# Altium PCB SafetyLightBoard.PcbDoc
Units mil, origin at the board's own origin, x right, y up, seen from the top; angles counter-clockwise.
Board outline 2250 x 2020 mil, 2 copper layers (Top Layer, Bottom Layer); 33 components, 27 nets, 122 pads, 20 vias.
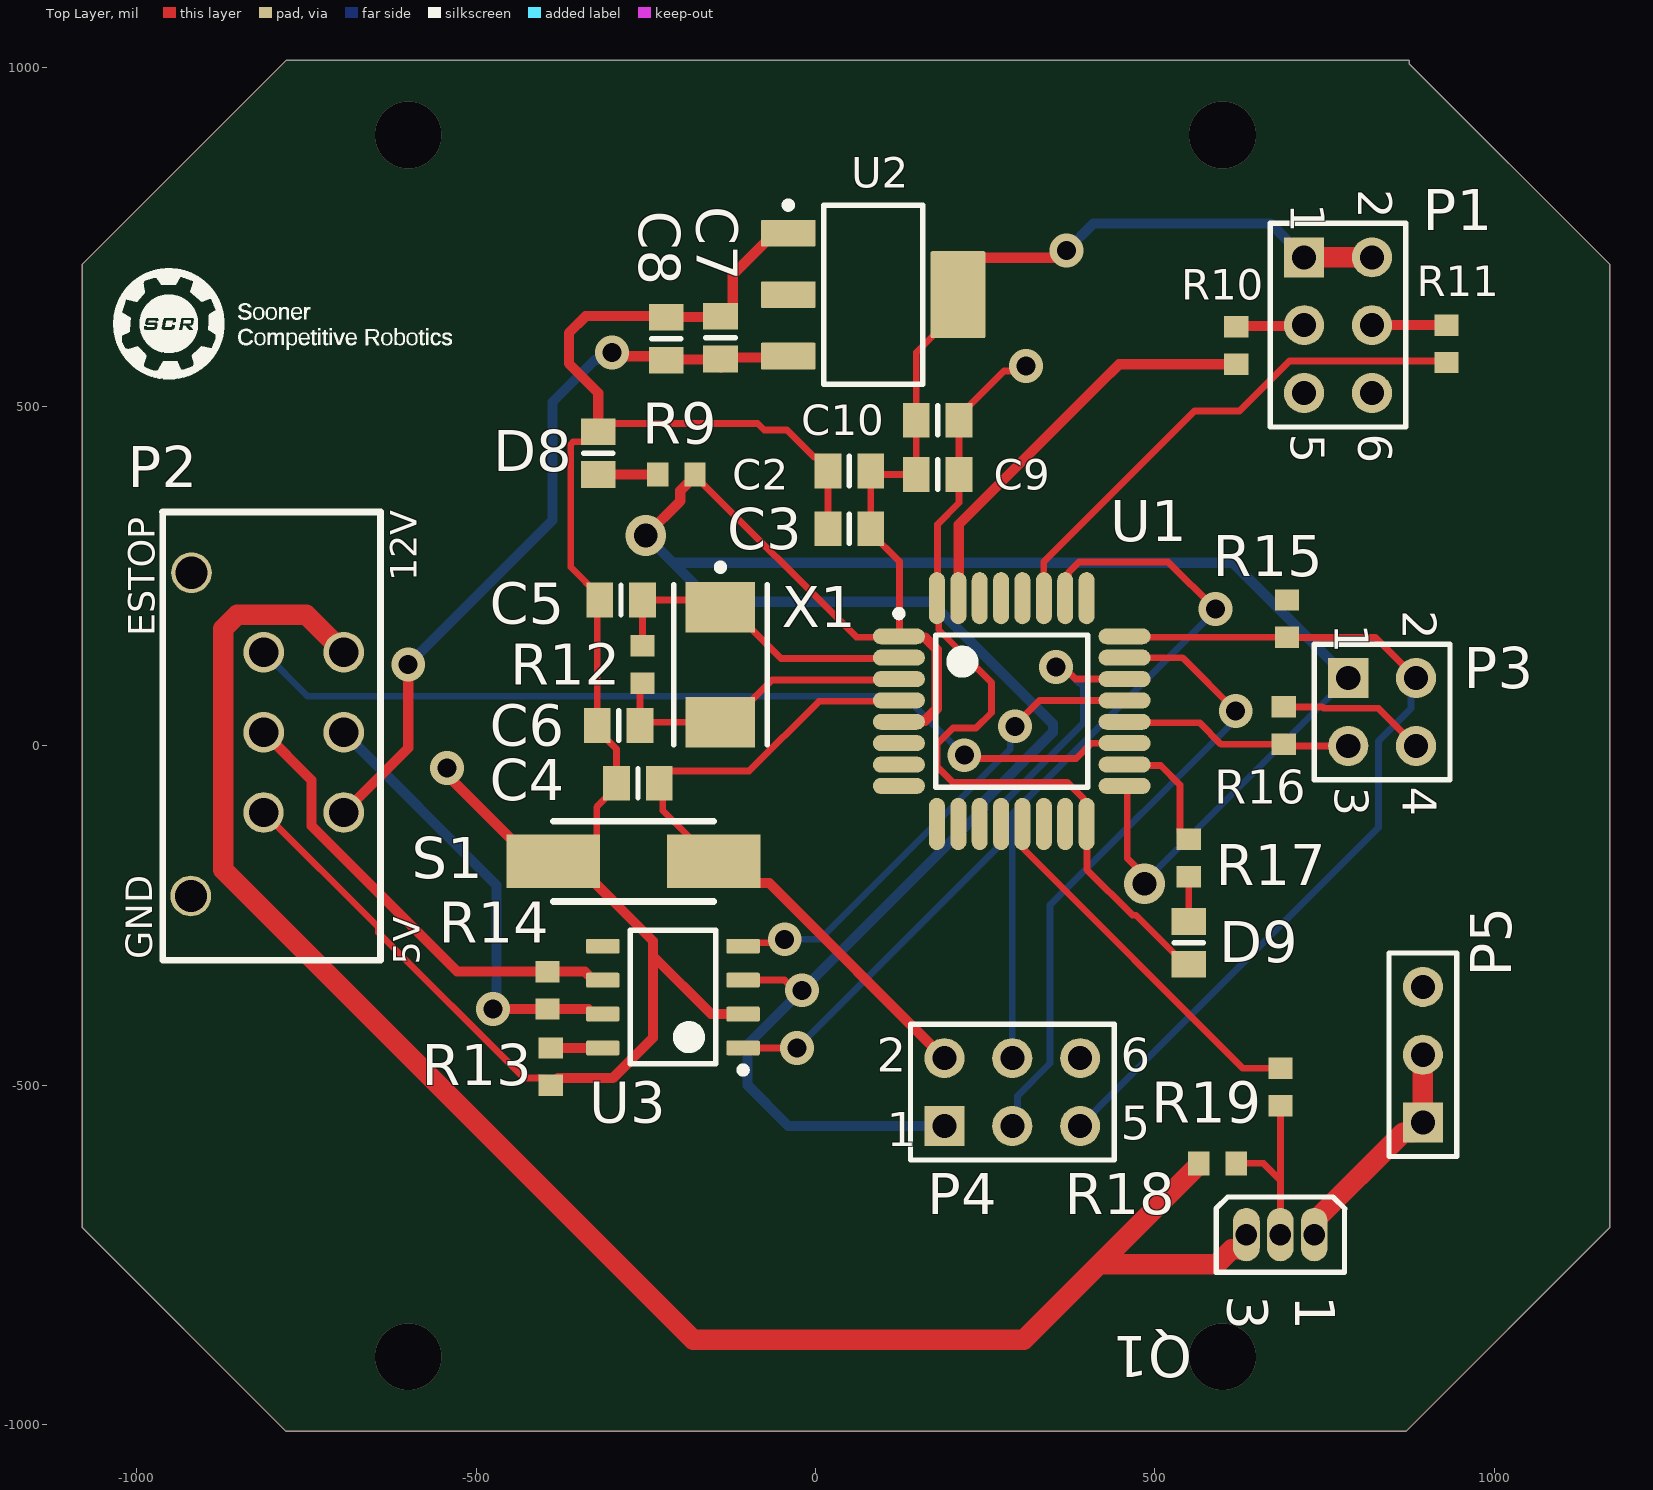
[diagram p0: Top Layer view]
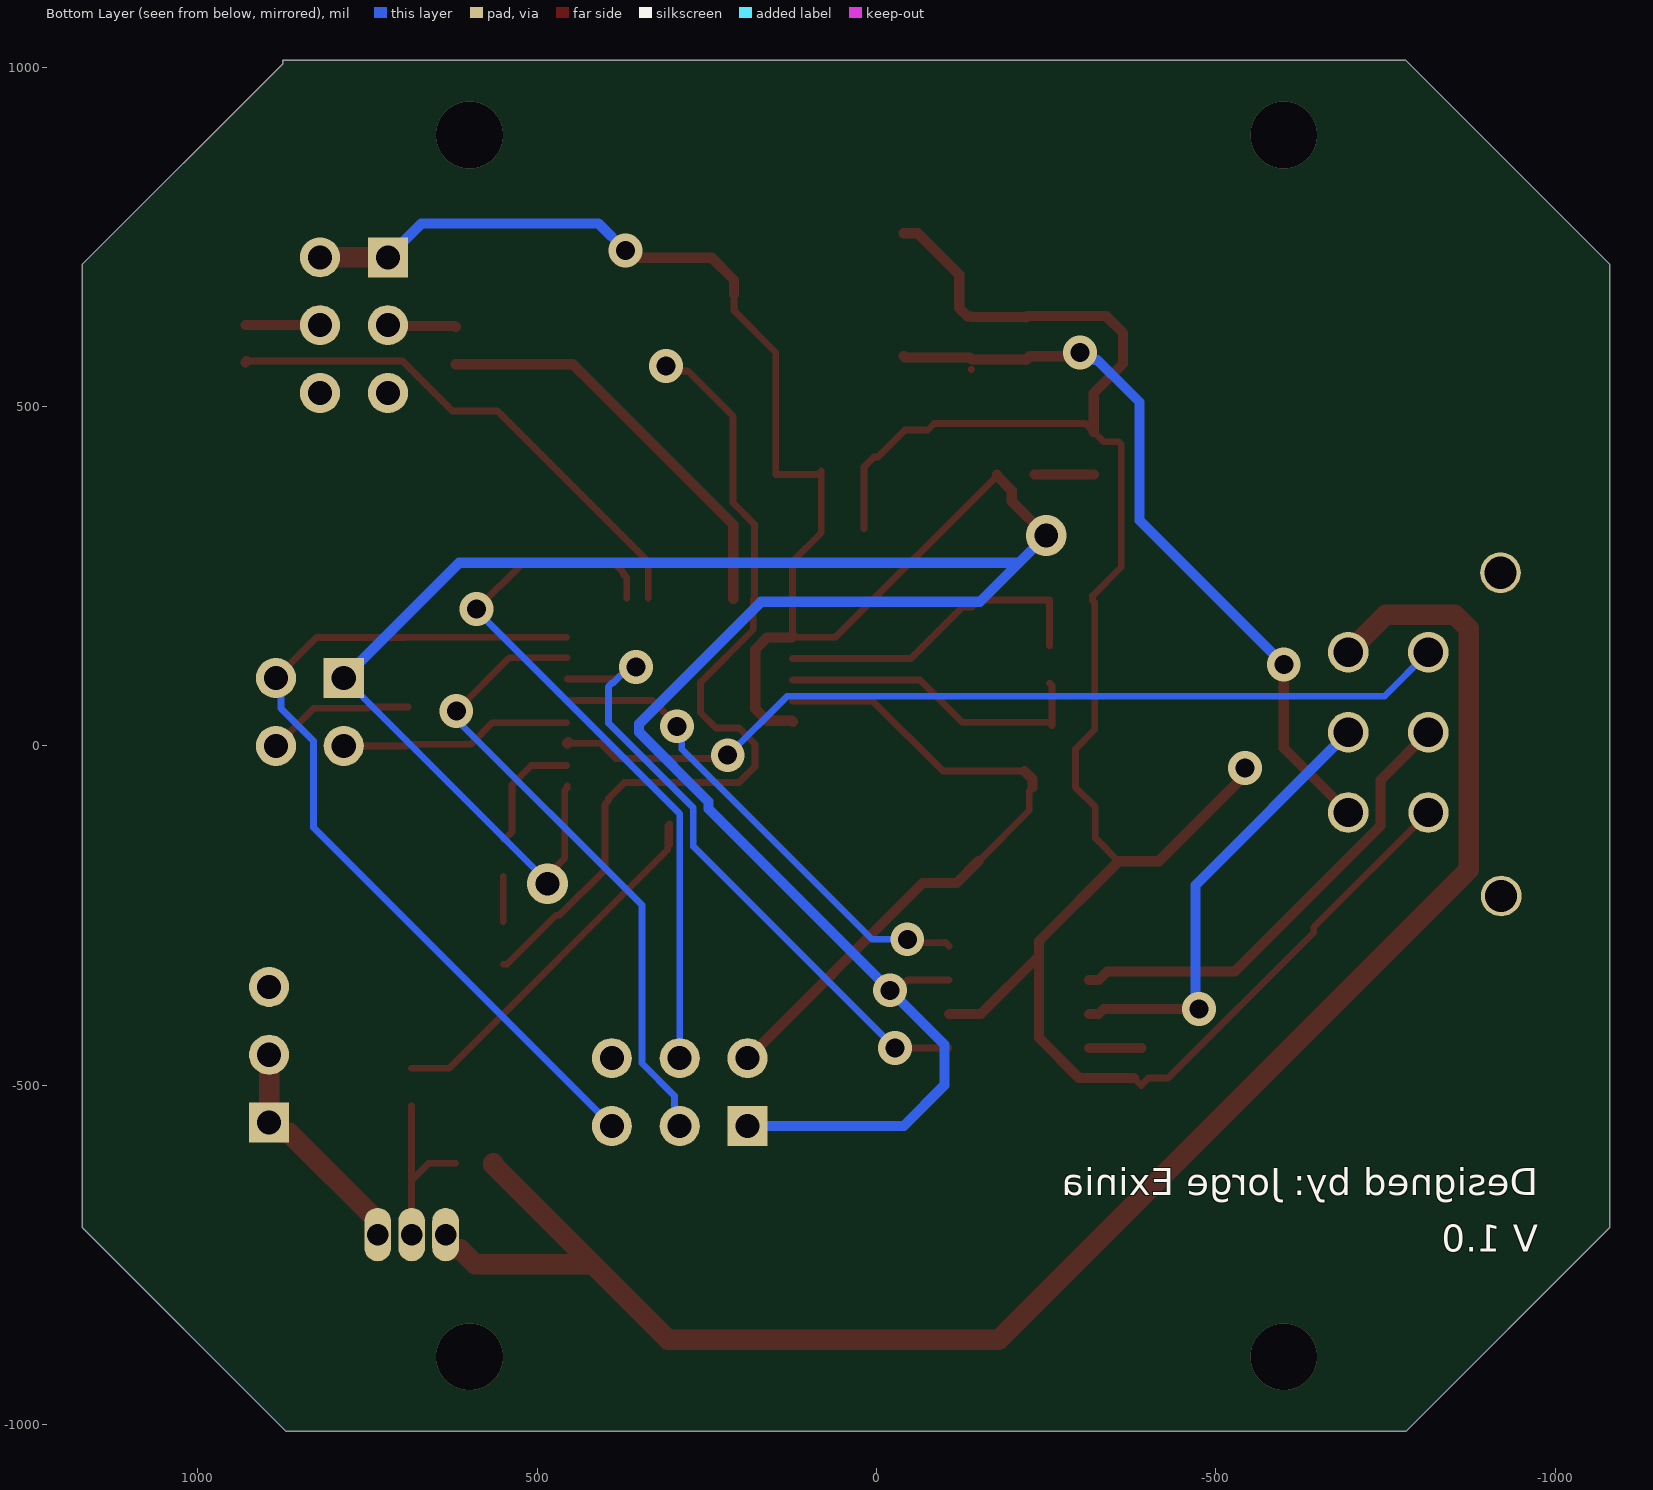
[diagram p1: Bottom Layer view, seen from below]

## Layer stack, top to bottom
Top Solder: solder mask 0.4, Solder Resist, Dk 3.5
Top Layer: signal copper 1.4
Dielectric 1: dielectric 12.6, FR-4, Dk 4.8
Bottom Layer: signal copper 1.4
Bottom Solder: solder mask 0.4, Solder Resist, Dk 3.5

## Board outline
1170,-710 870,-1010 -780,-1010 -1080,-710 -1080,710 -780,1010 875,1010 875,1005 1170,710

## Design rules (kind name [scope] priority, off if disabled: settings)
Clearance [All] p1: gap=10 ignorepadtopadclearanceinfootprint=FALSE except(0: Arc-Hole Track-Hole SMDPad-Hole THPad-Hole Via-Hole Fill-Hole Poly-Hole Region-Hole Text-Hole)
PolygonConnect [All] p1: connectstyle=Relief reliefconductorwidth=10 reliefentries=4 polygonreliefangle="90 Angle" airgapwidth=10
RoutingVias [All] p1: holewidth=28 width=50 viastyle="Through Hole" minholewidth=28 minwidth=50 maxholewidth=28 maxwidth=50
SolderMaskExpansion [All] p1: expansion=4 istentingtop=FALSE
Width [All] p1: maxlimit=50 minlimit=10 preferedwidth=10 minimp=50.000000 maximp=50.000000 favimp=50.000000
30 further rules are at their usual default settings.

## Components (designator, comment, footprint, x,y, rotation, side; value= is the part's Value field where it differs from the comment)
C2 "Cap" 6-0805_L 50,405 r0 top value=100nF
C3 "Cap" 6-0805_L 50,320 r0 top value=100nF
C4 "Cap" 6-0805_L -261.5,-55 r0 top value=0.1UF
C5 "Cap" 6-0805_L -286.5,215 r180 top value=20pF
C6 "Cap" 6-0805_L -290,30 r180 top value=20pF
C7 "Cap" 6-0805_L -140,601.5 r270 top value=100nF
C8 "Cap" 6-0805_L -220,600 r270 top value=100uF
C9 "Cap" 6-0805_L 180,400 r180 top value=330uF
C10 "Cap" 6-0805_L 180,480 r180 top value=100nF
D8 "LED1" 6-0805_L -320,431.5 r90 top
D9 "LED1" 6-0805_L 550,-290 r270 top
P1 "2x3 Header" HDR2X3 720,720 r270 top
P2 "2x3 Header" "Molex Connector" -813.11,-98.11 r90 top
P3 "Header 2X2" HDR2X2 785,100 r270 top
P4 "MHDR2X3" HDR2X3 190,-560 r0 top
P5 "Header 3H" HDR1X3 895,-555 r90 top
Q1 "MOSFET-P" E3 685,-720 r270 top
R9 "Res1" 1608[0603] -205,400 r180 top value=510
R10 "Res1" 1608[0603] 620,590 r270 top value=1K
R11 "Res1" 1608[0603] 930,592.56 r270 top value=1K
R12 "Res1" 1608[0603] -255,120 r270 top value=1M
R13 "Res1" 1608[0603] -390,-472.56 r90 top value=10K
R14 "Res1" 1608[0603] -395,-360 r270 top value=120
R15 "Res1" 1608[0603] 695,187.56 r90 top value=10k
R16 "Res1" 1608[0603] 690,30 r270 top value=10k
R17 "Res1" 1608[0603] 550,-165 r270 top value=510
R18 "Res1" 1608[0603] 592.44,-615 r180 top value=10k
R19 "Res1" 1608[0603] 685,-502.56 r90 top value=100
S1 "SW-PB" "Push Switch 3x6x2.5" -386.22,-170 r0 top
U1 "STM32F334K8T6" STM-LQFP32_M 289.25,51.34 r0 top
U2 "REG1117-3.3" DCY0004A_M 85,665 r0 top
U3 "SN65HVD230QDR" D0008A_L -210,-370 r180 top
X1 "ABM7-8.000MHZ-D2Y-T" ABRA-ABM7-2_V -140,119.65 r270 top

## Footprints (in the part's own frame and the unit in brackets; to place one, negate y for a bottom-side part, rotate by r counter-clockwise, add the part's x,y. Pads: shape width x height; smd on the part's side, far side on the other; paste and mask are expansions set on the pad)
6-0805_L [mm] "Chip Resistor, Body 2.0x1.2mm, IPC High Density"
  rect 1x1.3 smd: 1(-0.8,0) 2(0.8,0)
  silkscreen extent 0,-0.55 0,0.55, body extent -1.07,-0.7 1.07,0.7, height 0.7
1608[0603] [mm] "Chip Capacitor, Body 1.6x0.8mm, IPC High Density"
  rect 0.8x0.9 smd: 1(-0.7,0) 2(0.7,0)
  body extent -0.87,-0.48 0.87,0.48, height 1.3
ABRA-ABM7-2_V [mm] "SMD, 2-Leads, Body 6x3.5mm"
  rect 1.9x2.6 smd: 1(-2.15,0) 2(2.15,0)
  silkscreen extent -3.77,-1.75 3,1.75, body extent -3,-1.75 3,1.75, height 1.4
D0008A_L [mm] "SOIC, 8-Leads, Body 5x4mm, Pitch 1.27mm, IPC High Density"
  rrect18% 1.25x0.55 smd: 1(-2.625,1.905) 2(-2.625,0.635) 3(-2.625,-0.635) 4(-2.625,-1.905) 5(2.625,-1.905) 6(2.625,-0.635) 7(2.625,0.635) 8(2.625,1.905)
  silkscreen extent -2.75,-2.5 1.6,2.85, body extent -3,-2.45 3,2.45, height 1.63
DCY0004A_M [mm] "SOT223, 4-Leads, Body 6.7x3.7mm, Pitch 2.3mm, IPC Low Density"
  rrect10% 2.05x1 smd: 1(-3.175,2.3) 2(-3.175,0) 3(-3.175,-2.3)
  rrect5% 2.05x3.25 smd: 4(3.175,0)
  silkscreen extent -3.3,-3.35 1.85,3.47, body extent -3.5,-3.25 3.5,3.25, height 1.62
E3 [mm] "TO, Flat Index; 3 In-Line, Axial Leads; Body Dia. 4.6mm; Lead Dia. 0.5 mm (max)"
  oval 2x1 hole 0.8: 1(0,1.27) 2(0,0) 3(0,-1.27)
  silkscreen extent -1.41,-2.41 1.41,2.41
HDR1X3 [mm] "Connector; Header; 3 Position"
  rect 1.5x1.5 hole 0.9: 1(0,0)
  round 1.5 hole 0.9: 2(2.54,0) 3(5.08,0)
  silkscreen extent -1.27,-1.27 6.35,1.27
HDR2X2 [mm] "Connector; Header; 2x2 Position"
  rect 1.5x1.5 hole 0.9: 1(0,0)
  round 1.5 hole 0.9: 2(0,2.54) 3(2.54,0) 4(2.54,2.54)
  silkscreen extent -1.27,-1.27 3.81,3.81
HDR2X3 [mm] "Connector; Header; 3x2 Position"
  rect 1.5x1.5 hole 0.9: 1(0,0)
  round 1.5 hole 0.9: 2(0,2.54) 3(2.54,0) 4(2.54,2.54) 5(5.08,0) 6(5.08,2.54)
  silkscreen extent -1.27,-1.27 6.35,3.81
"Molex Connector" [mm]
  round 1.524 hole 1.1: 1(6,-3) 2(3,-3) 3(0,-3) 4(6,0) 5(3,0)
  oval 1.524x1.5 hole 1.1: 6(0,0)
  round 1.524 hole 1.2: ""(-3.125,2.725) ""(8.975,2.7)
  silkscreen extent -5.53,-4.39 11.25,3.78
"Push Switch 3x6x2.5" [mm]
  rect 3.5x2 smd: 1(0,0) 2(6,0)
  silkscreen extent 0,-1.5 6,1.5
STM-LQFP32_M [mm] "QFP, 32-Leads, Body 7x7mm, Pitch 0.8mm, IPC Low Density"
  oval 1.95x0.6 smd: 1(-4.225,2.8) 2(-4.225,2) 3(-4.225,1.2) 4(-4.225,0.4) 5(-4.225,-0.4) 6(-4.225,-1.2) 7(-4.225,-2) 8(-4.225,-2.8) 17(4.225,-2.8) 18(4.225,-2) 19(4.225,-1.2) 20(4.225,-0.4) 21(4.225,0.4) 22(4.225,1.2) 23(4.225,2) 24(4.225,2.8)
  oval 0.6x1.95 smd: 9(-2.8,-4.225) 10(-2,-4.225) 11(-1.2,-4.225) 12(-0.4,-4.225) 13(0.4,-4.225) 14(1.2,-4.225) 15(2,-4.225) 16(2.8,-4.225) 25(2.8,4.225) 26(2,4.225) 27(1.2,4.225) 28(0.4,4.225) 29(-0.4,4.225) 30(-1.2,4.225) 31(-2,4.225) 32(-2.8,4.225)
  silkscreen extent -4.35,-2.85 2.85,3.77, body extent -3.5,-3.5 3.5,3.5, height 1.6

## Part data
C2 C3 C4 C5 C6 C7 C8 C9 C10: "Capacitor", LatestRevisionDate=17-Jul-2002, LatestRevisionNote="Re-released for DXP Platform.", PackageDescription="Radial Cap, Thru-Hole; 2 Leads; 0.3 in Pin Spacing", PackageReference=RAD-0.3, Published=8-Jun-2000, Publisher="Altium Limited"
D8 D9: "Typical RED GaAs LED", LatestRevisionDate=08-Jul-2005, LatestRevisionNote="Mech Layer 1 removed.", PackageDescription="LED; 2 Leads", PackageReference=LED-1, Published=8-Jun-2000, Publisher="Altium Limited"
P3: "Header, 2-Pin, Dual row", LatestRevisionDate=17-Jul-2002, LatestRevisionNote="Re-released for DXP Platform.", Publisher="Altium Limited"
P4: "Header, 3-Pin, Dual row", LatestRevisionDate=17-Jul-2002, LatestRevisionNote="Re-released for DXP Platform.", Publisher="Altium Limited"
P5: "Header, 3-Pin, Right Angle", LatestRevisionDate=17-Jul-2002, LatestRevisionNote="Re-released for DXP Platform.", Publisher="Altium Limited"
Q1: "P-Channel MOSFET", LatestRevisionDate=17-Jul-2002, LatestRevisionNote="Re-released for DXP Platform.", PackageDescription="TO, Flat Index; 3 In-Line, Axial Leads; Body Dia. 4.6mm; Lead Dia. 0.5 mm (max)", PackageReference=E3, PackageVersion=1995/1996, Published=8-Jun-2000, Publisher="Altium Limited"
R9 R10 R11 R12 R13 R14 R15 R16 R17 R18 R19: "Resistor", LatestRevisionDate=17-Jul-2002, LatestRevisionNote="Re-released for DXP Platform.", PackageDescription="Axial Device, Thru-Hole; 2 Leads; 0.3 in Pin Spacing", PackageReference=AXIAL-0.3, Published=8-Jun-2000, Publisher="Altium Limited"
S1: "Switch", LatestRevisionDate=17-Jul-2002, LatestRevisionNote="Re-released for DXP Platform.", PackageDescription="Switch; 2 Leads", PackageReference=SPST-2, Published=24-Mar-1999, Publisher="Altium Limited"
U1: library part CMP-0537-00074-1, "ARM Cortex-M4 32-bit MCU, 64 KB Flash, 16 KB Internal RAM, 25 I/Os, 32-Pin LQFP, -40 to 85 degC, Tray", I/Os (High Current)=25, Operating Frequency(F) (Processor speed) (MHz)=72, Package Description="32-Pin Low Profile Quad Flat Package, 7 x 7 mm Body, 0.8 mm Pitch", Package Reference=LQFP32, Supply Voltage(Vcc) min (V)=2, ComponentLink1Description="Manufacturer URL", ComponentLink1URL=http://www.st.com/, ComponentLink2Description=Datasheet, ComponentLink2URL=http://www.st.com/st-web-ui/static/active/en/resource/technical/document/datasheet/DM00097745.pdf, Core="ARM Cortex-M4", D/A Converter=3, DatasheetVersion="Rev. 4", FLASH Size (Prog) (kB)=64, Internal RAM Size (kB)=16, Mounting Technology="Surface Mount", Packing=Tray
U2: library part CMP-0395-00549-2, "Single Output LDO, 800 mA, Fixed 3.3 V Output, 3.8 to 15 V Input, with Internal Current Limiting, 4-pin SOT-223 (DCY), -40 to 125 degC, Green (RoHS & no Sb/Br)", Manufacturer="Texas Instruments", Rating=Catalog, Code_JEDEC=TO-261, ComponentLink1Description="Manufacturer URL", ComponentLink1URL=http://www.ti.com/, ComponentLink2Description=Datasheet, ComponentLink2URL=http://www.ti.com/general/docs/lit/getliterature.tsp?genericPartNumber=REG1117-33&fileType=pdf, ComponentLink3Description="Package Specification", ComponentLink3URL=http://www.ti.com/litv/pdf/mpds094a, DatasheetVersion=SBVS001D, Eco-Plan="Green (RoHS & no Sb/Br)", Fixed Output Options(V)=5, Iout(Max)(A)=0.8, Iq(Typ)(mA)=4, Mounting Technology="Surface Mount", PackageDescription="4-Pin Plastic Small Outline, Body 3.5 x 6.5 mm, Pitch 2.3 mm", PackageReference=DCY0004A, PackageVersion=4202506/B, PartNumber=REG1117-3.3, SubFamily="Single Channel LDO", Vdo(Typ)(mV)=1100, Vin(Max)(V)=15, Vin(Min)(V)=3.8, Vout Adj(Max)(V)=3.3, Vout Adj(Min)(V)=3.3
U3: library part CMP-0315-00033-2, "Automotive Catalog 3.3 V CAN Transceiver, 17 mA, 3.3 V, -40 to 125 degC, 8-pin SOIC (D), Green (RoHS & no Sb/Br)", Drivers Per Package=1, Manufacturer="Texas Instruments", Rating=Catalog, Supply Voltage(s)(V)=3.3, Code_JEDEC=MS-012AA, ComponentLink1Description=Datasheet, ComponentLink1URL=http://www.ti.com/lit/ds/symlink/sn65hvd230.pdf, DatasheetVersion=SLOS346K, Eco-Plan="Green (RoHS & no Sb/Br)", ICC(Max)(mA)=17, Isolated=No, Mounting Technology="Surface Mount", PackageDescription="8-Pin Plastic Small Outline Integrated Circuit, 4.9 x 3.9 mm, Pitch 1.27 mm Pitch", PackageReference=D0008A, PackageVersion="revM, Jun-2011", PartNumber=SN65HVD230QDR, Receivers Per Package=1, SubFamily=CAN, Transient Pulse Protection(V)="-25 to 25"
X1: library part CMP-2000-05034-1, "Microprocessor Crystal, 8 MHz, 18 PF, -40 to 85 degC, 2-Pin SMD, RoHS, Tape and Reel", ESR (Equivalent Series Resistance)=100Ohm, Frequency=8MHz, Frequency Stability=±30ppm, Frequency Tolerance=±20ppm, Load Capacitance=18pF, Manufacturer=Abracon, Operating Mode=Fundamental, Operating Temperature=-40degC~85degC, Package / Case=2-SMD, Package Description="2-Pin Surface Mount Device, Body 6 x 3.5 mm", Package Reference=ABM7, Standard Package=1,000, 3D Model="ABM7.pdf /  / ABM7.stp", Catalog Drawings="ABM7SeriesTop /  / ABM7SeriesSide /  / ABM7SeriesBottom", Category=CrystalsandOscillators, Datasheet URL=https://datasheet.ciiva.com/1357/1718755-1357277.pdf, Datasheet Version=Dec-17, Family=Crystals, Featured Product=ABM7andABM11Crystals, Height="0.055\"(1.40mm)", Manufacturer URL=http://www.abracon.com/, Mounting Type=SurfaceMount, Online Catalog=ABM7Series, Other Names="535-9831-2 / ABM7-8.000MHZ-D-2-Y-T / ABM78000MHZD2YT", Packaging=Tape&Reel(TR), RoHS Information=RoHS2/REACHCompliance, Series=ABM7, Size / Dimension="0.236\"Lx0.138\"W(6.00mmx3.50mm)", Type=MHzCrystal

## Via types
v1: diameter 50, hole 28, Top Layer to Bottom Layer, 14 vias
v2: diameter 98.5, hole 98.5, Top Layer to Bottom Layer, 4 vias
v3: diameter 60, hole 35, Top Layer to Bottom Layer, 2 vias

## Nets (pads, with @x,y where several pads share a name; then routed paths per layer and width w, separated by ;. In a path a pad name is that pad's centre, name@x,y a point inside that pad or via, vN(x,y) a via of type N, cw(c..) or ccw(c..) an arc to the next point about the centre after c; other vN are vias at no path point)
+5: C7.2 C8.2 P2.3 U2.3 | length 1118
  Top Layer w10: C7.2@-140,555 C7.2@-139.45,554.45
  Top Layer w15: P2.3 -600,-3.11 v1(-600,120) ; v1(-300,580) -294.25,574.25 -225.75,574.25 C8.2 -219.25,569.25 -140.75,569.25 C7.2 -137.78,572.22 -42.22,572.22 U2.3
  Bottom Layer w15: v1(-600,120) -387.5,332.5 -387.5,506.69 -370.44,523.75 -325.68,568.51 -320.96,568.51 -309.47,580 v1(-300,580)
+12: P2.1 Q1.3 R18.2 | length 2641.8
  Top Layer w30: P2.1 -750,193.11 -851.89,193.11 -872.57,172.43 -872.57,-182.43 -180,-875 306.85,-875 418.43,-763.43 ; R18.2 564.88,-616.97 418.43,-763.43 ; Q1.3 635,-737.15 630.67,-741.48 613.52,-741.48 591.28,-763.72 418.72,-763.72 418.43,-763.43
BOOT0: R10.2 U1.31 | length 616.5
  Top Layer w15: U1.31@211.26,216.34 211.26,326.26 417.81,532.82 447.44,562.44 R10.2
BOOT1: R11.2 U1.27 | length 770.6
  Top Layer w10: U1.27 336.5,271.5 558.43,493.43 625,493.43 698.6,567.03 R11.2@927.97,567.03
  Top Layer w15: R11.2@927.97,567.03 R11.2
CAN_RX: U1.21 U3.4 | length 728.5
  Top Layer w10: U3.4 -100.83,-289.17 -100.09,-289.91 -50.38,-289.91 v1(-45.29,-284.82) ; v1(293.95,29.01) 293.95,30.97 330.07,67.09 U1.21
  Bottom Layer w10: v1(-45.29,-284.82) 6.75,-284.82 287.05,-4.52 287.05,20.02 v1@294.7,27.68
CAN_TX: U1.22 U3.1 | length 971.1
  Top Layer w10: U3.1 v1(-27.05,-445) ; v1(354.25,116.34) 365.08,116.34 382.83,98.58 U1.22
  Bottom Layer w10: v1@-45,-445 -37.5,-437.5 -34.55,-437.5 v1(-27.05,-445) 270,-147.95 270,-91.48 395,33.52 395,87.35 389.14,93.2 387.62,93.2 365.82,115 v1@355,115
CANH: P2.2 R14.2 U3.7 | length 665.5
  Top Layer w15: v1(-475,-387.44) -474.94,-387.5 -395.06,-387.5 R14.2 -334.57,-387.56 -327.13,-395 U3.7
  Bottom Layer w15: P2.2 -470,-205 v1@-470,-387.5
CANL: P2.5 R14.1 U3.6 | length 690.3
  Top Layer w15: P2.5 -742.5,-50.61 -742.5,-117.79 -595.29,-265 -527.84,-332.44 R14.1 -339.68,-332.44 -327.13,-345 U3.6
ESTOP_SIG: P2.4 U1.19 | length 1346.7
  Top Layer w10: v1(219.25,-13.66) 224.25,-18.66 384.25,-18.66 407.01,4.09 U1.19
  Top Layer w15: U1.19@453.94,5.74 U1.19
  Bottom Layer w10: P2.4 -748.1,73.1 -463.1,73.1 131.9,73.1 v1@220,-15
GND: C2.1 C3.1 C4.1 C5.2 C6.2 C7.1 C8.1 C9.1 C10.1 D8.2 D9.2 P1.5 P1.6 P2.6 P3.4 P4.6 P5.3 R13.1 R16.1 S1.1 U1.16 U1.32 U2.1 U3.2 | length 4771.8
  Top Layer w10: P2.6 -644.21,-267.01 -644.21,-274.8 -429.64,-489.37 -400.75,-489.37 R13.1 R13.1@-379.25,-489.37 ; S1.1@-356.69,-170 -322.32,-135.63 -322.32,-90.24 -292.99,-60.91 C4.1 -292.99,-4.41 -321.5,24.09 C6.2 -321.5,211.5 C5.2 -317.99,220.91 -360.59,263.5 -360.59,444.14 -356.43,448.31 -334.69,448.31 D8.2 -307.99,475 -85,475 -75.43,465.43 -41.93,465.43 -2.09,425.59 3.82,425.59 18.5,410.91 C2.1 C3.1 ; U1.32 181.62,215.07 181.62,171.22 259.25,93.59 259.25,48.91 236.68,26.34 202.68,26.34 179.25,2.91 179.25,-30.23 202.8,-53.77 371.26,-53.77 394.8,-77.32 394.8,-80.05 U1.16@399.49,-84.74 ; U1.32@179.76,216.34 179.76,326.58 211.5,358.32 C9.1 C10.1 211.5,485.91 277.94,552.35 302.35,552.35 v1(310,560) ; U1.16@400.24,-86.08 400.24,-182.54 467.03,-249.33 471.93,-249.33 544.09,-321.5 D9.2 ; R16.1 747.17,57.56 749.26,55.47 829.53,55.47 P3.4
  Top Layer w15: v1(-542.73,-32.27) -536.04,-38.96 -536.04,-49.71 -415.75,-170 S1.1 -356.69,-170 -239.29,-287.4 -239.29,-309.47 ; R13.1@-379.25,-489.37 -298.68,-489.37 -239.29,-429.99 -239.29,-309.47 ; D8.2 -320,520.14 -363.3,563.44 -363.3,608.4 -338.4,633.3 -221.8,633.3 C8.1 -219.25,632.24 -140.75,632.24 C7.1 -134.09,632.99 -121.91,645.18 -121.91,694.31 -60.67,755.55 U2.1 ; U3.2 -153.76,-395 -239.29,-309.47
NetC5_1: C5.1 R12.1 U1.2 X1.1 | length 481.8
  Top Layer w10: R12.1 C5.1 -150.71,215 X1.1 -126.22,204.29 -50.67,128.74 U1.2@123.66,128.74
NetC6_1: C6.1 R12.2 U1.3 X1.2 | length 473.9
  Top Layer w10: R12.2 -258.5,88.94 -258.5,35 C6.1 -253.5,35 X1.2 -126.22,35 -63.98,97.24 U1.3@123.66,97.24
NetD8_1: D8.1 R9.2 | length 87.4
  Top Layer w15: D8.1 R9.2
NetD9_1: D9.1 R17.2 | length 65.9
  Top Layer w10: D9.1 R17.2
NetP1_3: P1.3 R10.1 | length 101
  Top Layer w15: R10.1 621.22,618.78 718.78,618.78 P1.3
NetP1_4: P1.4 R11.1 | length 110
  Top Layer w15: P1.4 820.06,620.06 929.94,620.06 R11.1
NetP5_1: P5.1 P5.2 Q1.1 | length 339.9
  Top Layer w30: Q1.1 735,-700.32 865.79,-569.53 880.47,-569.53 P5.1 P5.2
NetQ1_2: Q1.2 R18.1 R19.1 | length 265.2
  Top Layer w10: R18.1 660,-615 685,-640 ; Q1.2 685,-640 ; R19.1 685,-640
NetR13_2: R13.2 U3.8 | length 76.7
  Top Layer w15: R13.2 U3.8
NRST: C4.2 P4.2 S1.2 U1.4 | length 1015.4
  Top Layer w10: C4.2@-230,-60.91 -225,-65.91 -225,-95 S1.2 ; C4.2@-217.81,-36.91 -97.66,-36.91 5,65.75 U1.4@123.66,65.75
  Top Layer w15: C4.2@-230,-60.91 C4.2 -230,-49.09 C4.2@-217.81,-36.91 ; S1.2 -118.13,-201.87 -68.13,-201.87 P4.2
PA7: R19.2 U1.13 | length 579.8
  Top Layer w10: U1.13@305,-145.26 U1.13 307.61,-117.61 307.61,-152.49 630.12,-475 R19.2
PA8: R17.1 U1.18 | length 179.3
  Top Layer w10: U1.18@456.34,-28.74 508.74,-28.74 537.28,-57.28 537.28,-126.69 548.03,-137.44 R17.1
PA10: P3.3 R16.2 U1.20 | length 342.8
  Top Layer w10: U1.20@456.34,34.25 566.04,34.25 597.85,2.44 R16.2 692.44,0 P3.3
PA13: P4.3 U1.23 | length 943
  Top Layer w10: U1.23 540.51,130.08 v1(619.25,51.34)
  Bottom Layer w10: P4.3 297.5,-552.5 297.5,-515.47 345.47,-467.5 345.47,-234.53 620,40 v1@620,50
PA14: P3.2 P4.5 R15.1 U1.24 | length 1318.6
  Top Layer w10: U1.24@456.34,160.24 694.76,160.24 R15.1 825,160 P3.2
  Bottom Layer w10: P4.5 829.53,-120.47 829.53,7.5 877.5,55.47 877.5,92.5 P3.2
PB3: P4.4 U1.26 | length 1076
  Top Layer w10: U1.26 367.99,247.94 372.68,252.62 372.68,255.36 388.38,271.06 519.76,271.06 v1(589.25,201.57)
  Bottom Layer w10: P4.4 290,-99.76 v1@590,200.24
VCC: C2.2 C3.2 C9.2 C10.2 P1.1 P1.2 P3.1 P4.1 R9.1 R15.2 U1.1 U1.5 U1.17 U2.2 U2.4 U3.3 | length 5561.3
  Top Layer w10: R9.1@-177.44,398.03 60.35,160.24 123.66,160.24 123.66,271.93 81.5,314.09 C3.2 81.5,400 C2.2 86.5,400 C9.2 C10.2 148.5,579.88 210,641.38 U2.4@210,660.35 ; U3.3 -45.82,-345 -30.82,-360 v1(-20,-360) ; U1.17 455.59,-61.53 459.25,-65.19 459.25,-165.02 484.92,-190.69 v3(484.92,-202.99)
  Top Layer w15: v3(-250,310) -199.31,360.69 -199.31,376.16 -177.44,398.03 R9.1 ; U1.5 124.56,37.24 161.09,37.24 178.8,54.95 178.8,142.22 161.09,159.93 124.56,159.93 U1.1 ; U2.4 210,686.6 242.85,719.46 349.99,719.46 360.53,730 v1(370,730) ; P1.1@697.97,742.03 P1.1
  Top Layer w30: P1.1 P1.2
  Bottom Layer w10: v3@485.67,-204.33 485.67,-199.33 P3.1
  Bottom Layer w15: v3(-250,310) -210,270 ; P4.1 -40,-560 -100,-500 -100,-440 247.5,-92.5 247.5,-82.16 349.86,20.2 349.86,32.62 170,212.48 -152.48,212.48 -210,270 ; v1(370,730) 410,770 670,770 P1.1 ; P3.1 615,270 -210,270
pads on no net: P2. U1.6 U1.7 U1.8 U1.9 U1.10 U1.11 U1.12 U1.14 U1.15 U1.25 U1.28 U1.29 U1.30 U3.5
copper on no net:
  other v2: -600,-900 600,-900 -600,900 600,900

## Polygon pours and split planes (outlines as drawn)
VCC on Top Layer "VCC_POUR" (solid, shelved, pour order 8): 1170,-710 870,-1010 -780,-1010 -1080,-710 -1080,710 -780,1010 875,1010 875,1005 1170,710
GND on Bottom Layer "GND_POUR" (solid, shelved, pour order 9): 1170,-710 870,-1010 -780,-1010 -1080,-710 -1080,710 -780,1010 875,1010 875,1005 1170,710

## Silkscreen, mask and mechanical layers (free items; w line width, h text height)
Top Overlay:
  drawing of 31 lines, arcs and shapes, not listed
Bottom Overlay:
  text "Designed by: Jorge Exinia" at -975,-661.67 h40
  text "V 1.0" at -975,-745 h40
Mechanical 1:
  lines w10: -1080,-710 -1080,710 -780,1010 870,1010 1170,710 1170,-710 870,-1010 -780,-1010 -1080,-710

## Text inside footprints (layer, text, board x,y; h text height)
P1: Top Overlay "1" at 700,800 h50 r270; Top Overlay "2" at 800,820 h50 r270; Top Overlay "5" at 700,460 h50 r270; Top Overlay "6" at 800,460 h50 r270
P2: Top Overlay "ESTOP" at -973.54,161.73 h39.37 r90; Top Overlay "GND" at -977.48,-314.65 h39.37 r90; Top Overlay "5V" at -582.8,-322.52 h39.37 r90; Top Overlay "12V" at -587.72,242.44 h39.37 r90
P3: Top Overlay "1" at 765,180 h50 r270; Top Overlay "2" at 865,200 h50 r270; Top Overlay "4" at 865,-60 h50 r270; Top Overlay "3" at 765,-60 h50 r270
P4: Top Overlay "6" at 450,-480 h50; Top Overlay "1" at 105,-590 h50; Top Overlay "2" at 90,-480 h50; Top Overlay "5" at 450,-580 h50
Q1: Top Overlay "1" at 706.85,-809.57 h59.05 r270; Top Overlay "3" at 607.72,-809.57 h59.05 r270